# Altium PCB HT66FM5440_EVB.PcbDoc (part 1 of 3)
Units mm, origin at the board's own origin, x right, y up, seen from the top; angles counter-clockwise.
Board outline 80.01 x 50.8 mm, 2 copper layers (Top Layer, Bottom Layer); 96 components, 61 nets, 254 pads, 376 vias.
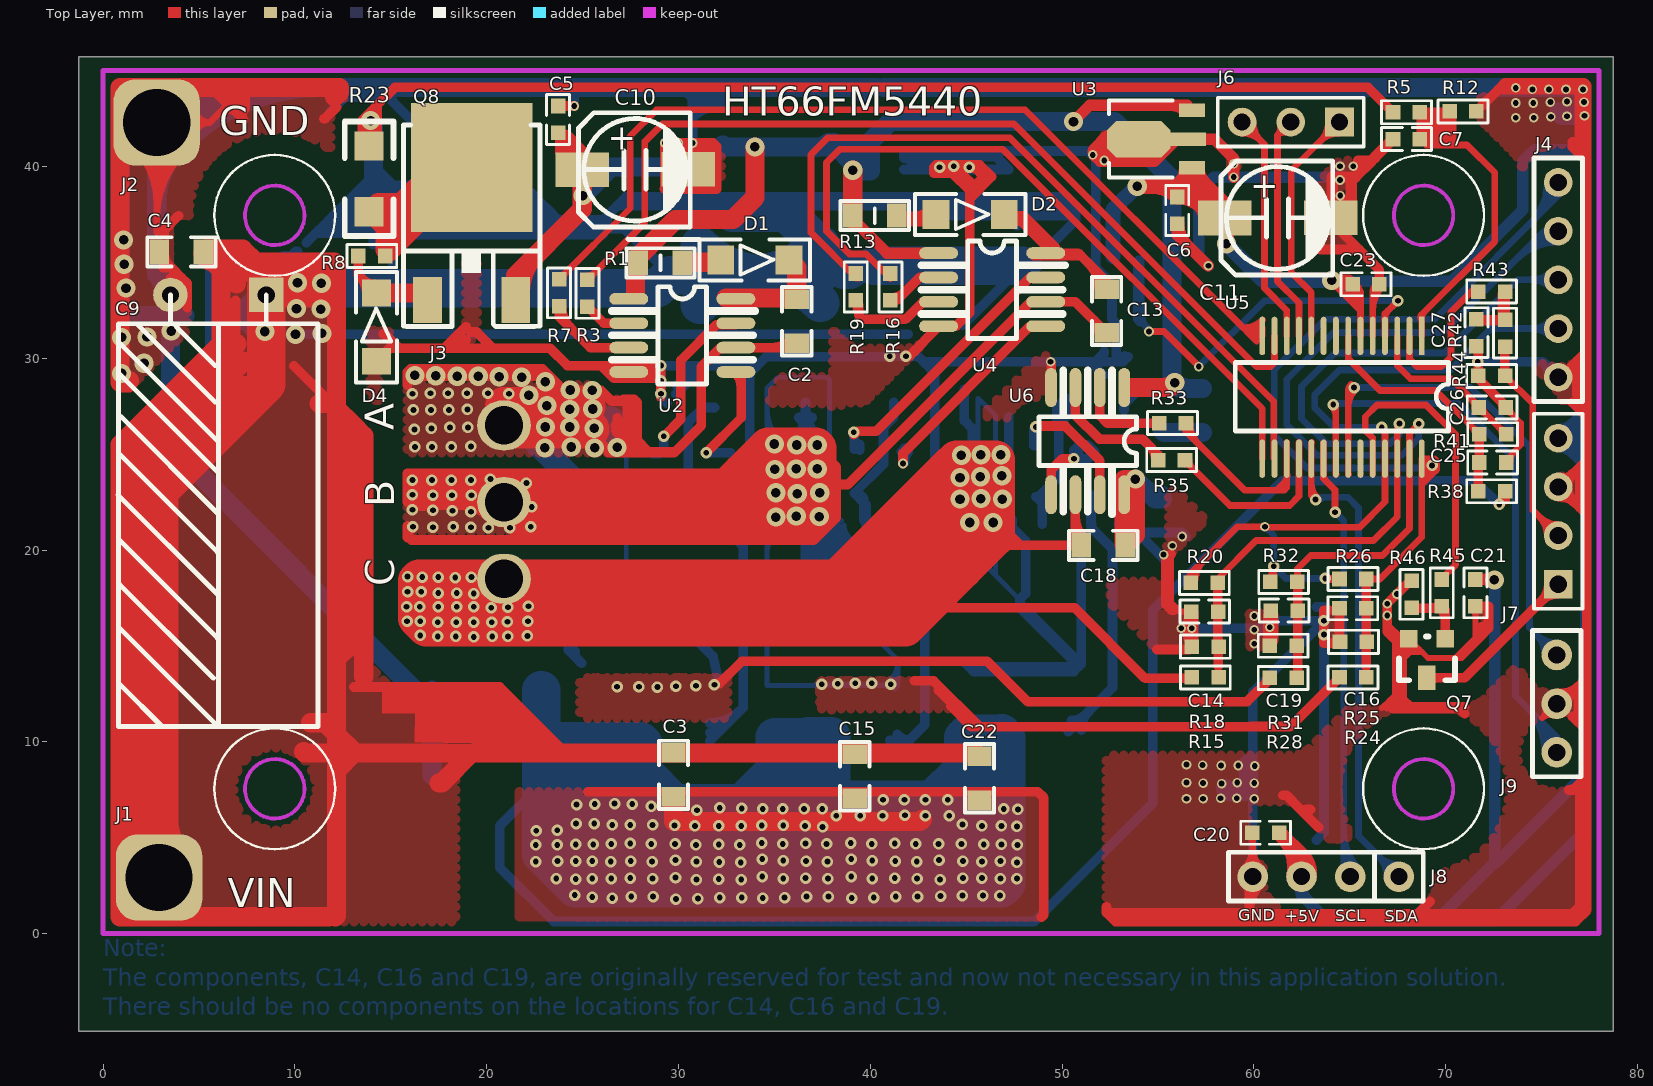
[diagram p0: Top Layer view]
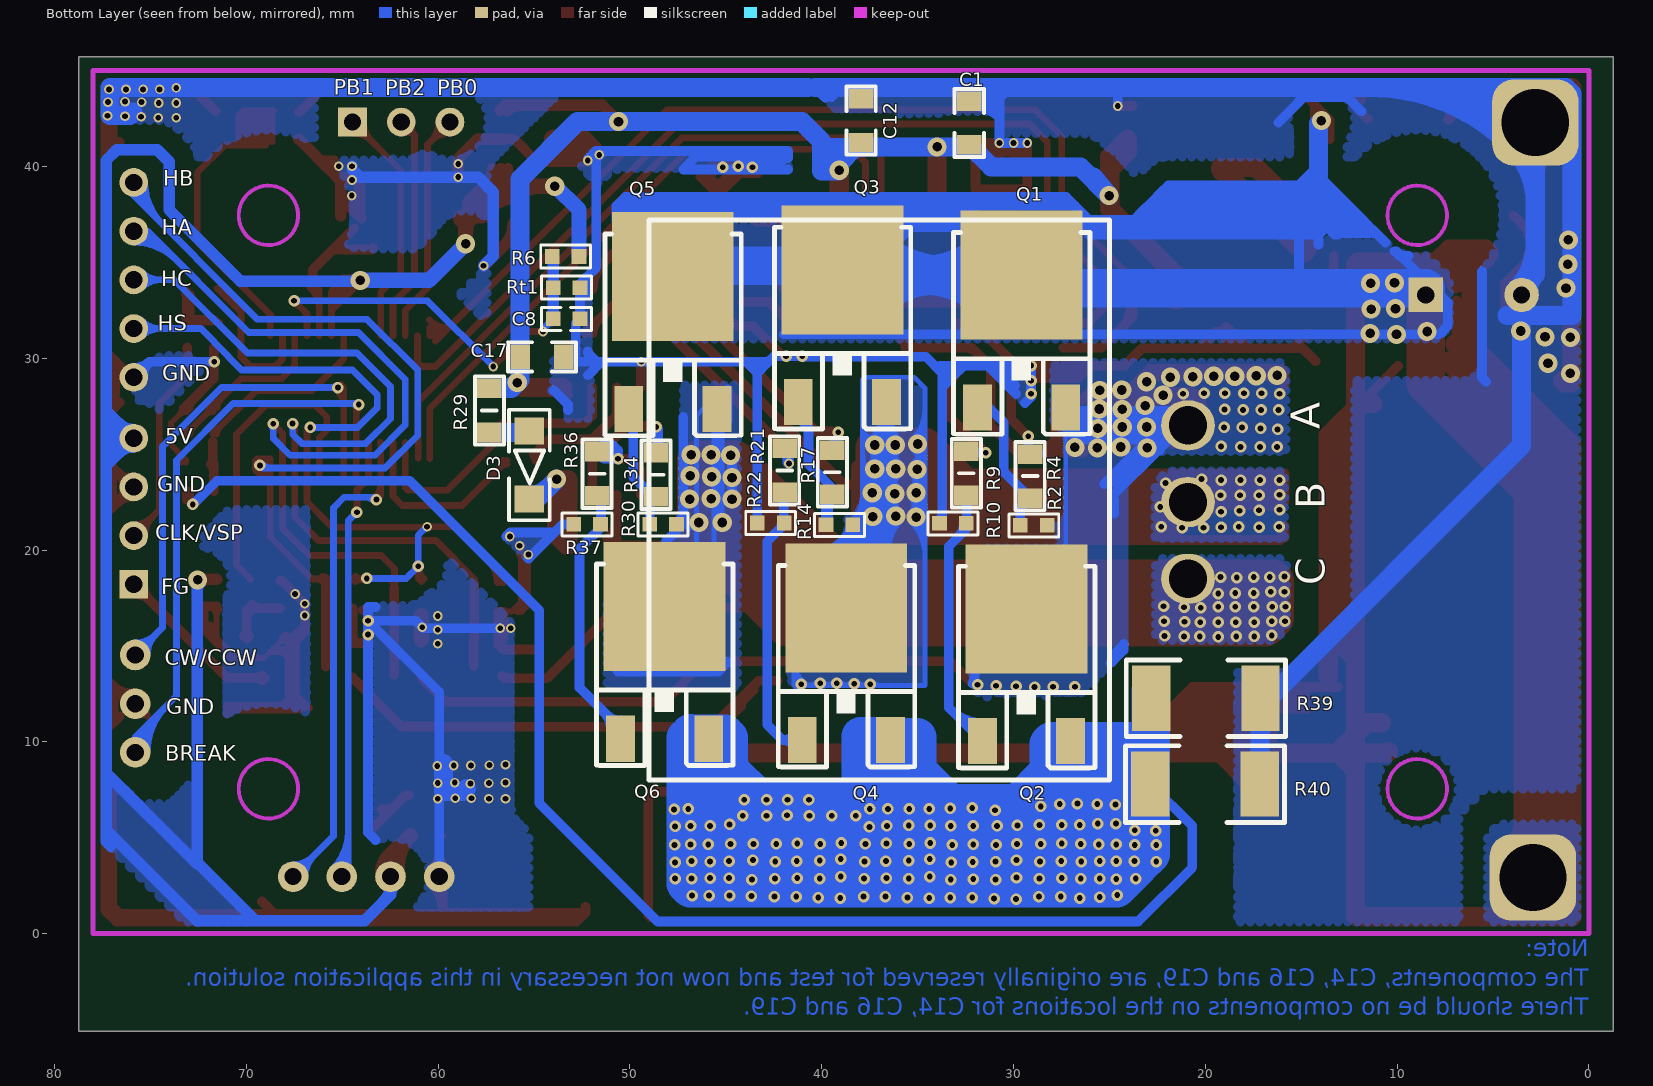
[diagram p1: Bottom Layer view, seen from below]

## Layer stack, top to bottom
Top Solder: solder mask 0.0102, Solder Resist, Dk 3.5
Top Layer: signal copper 0.0356
Dielectric1: dielectric 0.32, FR-4, Dk 4.8
Bottom Layer: signal copper 0.0356
Bottom Solder: solder mask 0.0102, Solder Resist, Dk 3.5

## Board outline
-1.27,-5.08 78.74,-5.08 78.74,45.72 -1.27,45.72

## Design rules (kind name [scope] priority, off if disabled: settings)
Clearance [All] p1: gap=0.254
ComponentClearance [All] p1: gap=0 collisioncheckmode=3 verticalgap=0 showdistances=FALSE
HoleSize [All] p1: absolutevalues=TRUE maxlimit=5 minlimit=0.025 maxpercent=80.000 minpercent=20.000
HoleToHoleClearance [All] p1: gap=0.1 allowstackedmicrovias=TRUE
MinimumSolderMaskSliver [All] p1: minsoldermaskwidth=0.1
PlaneConnect [All] p1: planeconnectstyle=Direct reliefexpansion=0.508 reliefentries=4 reliefconductorwidth=0.254 reliefairgap=0.254
PolygonConnect [All] p1: connectstyle=Direct reliefconductorwidth=0.254 reliefentries=4 polygonreliefangle="90 Angle" airgapwidth=0.254
RoutingVias [All] p1: holewidth=0.711 width=1.27 viastyle="Through Hole" minholewidth=0.3 minwidth=0.4 maxholewidth=0.711 maxwidth=1.27
SilkToSilkClearance [All] p1: silktosilkclearance=0
SilkToSolderMaskClearance SilkscreenOverComponentPads [IsPad] p1: minsilkscreentomaskgap=0 clearancetoexposedcopper=TRUE
SolderMaskExpansion [All] p1: expansion=0.102
Width [All] p1: maxlimit=3 minlimit=0.254 preferedwidth=0.254
23 further rules are at their usual default settings.

## Components (designator, comment, footprint, x,y, rotation, side; value= is the part's Value field where it differs from the comment)
C1 "0.1uF" 0805C 32.309,43.409 r270 bottom
C2 "470uF" 0805C 36.17,33.071 r270 top
C3 "0.1uF/50V" 0805C 29.743,9.423 r270 top
C4 "0.1uF" 0805C 5.22,35.547 r180 top
C5 "0.1uF" 0603C 23.724,41.758 r90 top
C6 "0.1uF" 0603C 56.007,38.405 r270 top
C7 "0.1uF" 0603C 68.656,41.427 r180 top
C8 "0.1uF" 0603C 54,32.055 r180 bottom
C9 "470uF" CD-10.5*21 8.509,33.299 r180 top
C10 "470uF" "ECAP 35V47UF" 27.737,39.827 r0 top
C11 "470uF" "ECAP 35V47UF" 61.239,37.313 r0 top
C12 "0.1uF" 0805C 37.948,43.536 r270 bottom
C13 "470uF" 0805C 52.324,33.604 r270 top
C14 "0.1uF" 0603C 56.744,16.789 r0 top
C15 "0.1uF/50V" 0805C 39.192,9.347 r270 top
C16 "0.1uF" 0603C 64.465,16.967 r0 top
C17 "0.1uF" 0805C 53.442,30.074 r0 bottom
C18 "470uF" 0805C 53.289,20.244 r180 top
C19 "0.1uF" 0603C 60.884,16.84 r0 top
C20 "0.1uF" 0603C 59.919,5.258 r0 top
C21 "0.1uF" 0603C 71.552,18.466 r270 top
C22 "0.1uF/50V" 0805C 45.695,9.246 r270 top
C23 "0.1uF" 0603C 66.548,33.858 r180 top
C25 "0.1uF" 0603C 71.755,24.562 r0 top
C26 "1uF" 0603C 71.73,27.432 r0 top
C27 "1uF" 0603C 71.603,32.029 r270 top
D1 "1N4148" 1206D 32.207,35.128 r0 top
D2 "1N4148" 1206D 43.434,37.49 r0 top
D3 "1N4148" 1206D 55.245,26.213 r270 bottom
D4 "15V" 1206D 14.249,29.845 r90 top
J1 "BAT" SIP1-big 2.921,2.921 r0 top
J2 "GND" SIP1-big 2.794,42.291 r0 top
J3 "BLDC motor(1)" SIP3-4mm 20.9,22.5 r180 top
J4 "CON5" SIP5-2.54mm 75.87,39.167 r0 top
J6 "CON3" HDR1X3 64.465,42.316 r180 top
J7 "Speed command" HDR1X4 75.87,18.212 r90 top
J8 "CON4" SIP4 67.564,2.972 r180 top
J9 "CON3" SIP3-2.54mm 75.794,9.449 r180 top
Q1 "P0706BD" TO252 31.877,27.432 r180 bottom
Q2 "P0706BD" TO252 31.623,10.033 r180 bottom
Q3 "P0706BD" TO252 41.224,27.711 r180 bottom
Q4 "P0706BD" TO252 41.021,10.084 r180 bottom
Q5 "P0706BD" TO252 50.063,27.356 r180 bottom
Q6 "P0706BD" TO252 50.495,10.16 r180 bottom
Q7 "2N3904" SOT-23 69.037,14.351 r180 top
Q8 "P0706BD" TO252 16.916,33.045 r0 top
R1 "22" 0805R 27.915,34.976 r0 top
R2 "10K" 0603R 28.245,21.285 r180 bottom
R3 "1K" 0603R 25.248,34.087 r90 top
R4 "22" 0805R 29.134,22.708 r90 bottom
R5 "91K" 0603R 68.656,42.824 r0 top
R6 "10K" 0603R 54.051,35.306 r0 bottom
R7 "1K" 0603R 23.774,34.112 r90 top
R8 "240" 0603R 13.31,35.331 r180 top
R9 "22" 0805R 32.461,25.146 r270 bottom
R10 "10K" 0603R 32.461,21.387 r180 bottom
R12 "10K" 0603R 71.603,42.875 r0 top
R13 "22" 0805R 39.091,37.44 r0 top
R14 "10K" 0603R 38.379,21.311 r180 bottom
R15 "15K 1%" 0603R 56.769,13.36 r180 top
R16 "1K" 0603R 41.046,34.417 r90 top
R17 "22" 0805R 39.446,22.911 r90 bottom
R18 "2K 1%" 0603R 56.769,14.961 r180 top
R19 "1K" 0603R 39.243,34.417 r90 top
R20 "10K 1%" 0603R 56.718,18.288 r180 top
R21 "22" 0805R 41.935,25.298 r270 bottom
R22 "10K" 0603R 41.961,21.412 r180 bottom
R23 "0" 1206 13.868,41.072 r270 top
R24 "15K 1%" 0603R 64.465,13.36 r180 top
R25 "2K 1%" 0603R 64.491,15.215 r180 top
R26 "10K 1%" 0603R 64.465,18.491 r180 top
R28 "15K 1%" 0603R 60.833,13.335 r180 top
R29 "22" 0805R 57.328,28.423 r270 bottom
R30 "10K" 0603R 47.574,21.336 r180 bottom
R31 "2K 1%" 0603R 60.833,15.011 r180 top
R32 "10K 1%" 0603R 60.858,18.339 r180 top
R33 "1K" 0603R 56.464,26.619 r0 top
R34 "22" 0805R 48.641,22.784 r90 bottom
R35 "1K" 0603R 56.413,24.689 r0 top
R36 "22" 0805R 51.714,25.121 r270 bottom
R37 "10K" 0603R 51.537,21.336 r180 bottom
R38 "1K 1%" 0603R 71.704,23.063 r180 top
R39 "0.01" 2512 17.12,12.268 r0 bottom
R40 "0.01" 2512 17.17,7.798 r0 bottom
R41 "10K" 0603R 73.152,26.035 r0 top
R42 "4.7K" 0603R 73.101,30.607 r270 top
R43 "0" 0603R 73.101,33.477 r0 top
R44 "1M" 0603R 71.704,29.083 r180 top
R45 "470" 0603R 69.799,17.069 r270 top
R46 "5.1K" 0603R 68.224,18.39 r90 top
Rt1 "68K" 0603R 52.603,33.68 r180 bottom (schematic designator RT1)
U2 "IR2101" SOP-8 27.407,33.096 r0 top
U3 "78L05" SOT-89 56.769,39.929 r90 top
U4 "IR2101" SOP-8 43.561,35.484 r0 top
U5 "HT66FM5440/28SSOP" SSOP28 68.758,31.166 r270 top
U6 "IR2101" SOP-8 53.238,28.473 r270 top

## Footprints (in the part's own frame and the unit in brackets; to place one, negate y for a bottom-side part, rotate by r counter-clockwise, add the part's x,y. Pads: shape width x height; smd on the part's side, far side on the other; paste and mask are expansions set on the pad)
0603C [mil]
  rect 30x30 smd: 1(55,0) 2(0,0)
  silkscreen extent -24,-24 79,24
0603R [mil]
  rect 30x30 smd: 1(0,0) 2(-55,0)
  silkscreen extent -79,-24 24,24
0805C [mil]
  rect 40x50 smd: 1(0,0) 2(90,0)
  silkscreen extent -25,-30 115,30
0805R [mil]
  rect 40x50 smd: 1(0,0) 2(90,0)
  silkscreen extent -25,-30 115,30
1206 [mil]
  rect 60x60 smd: 1(0,0) 2(135,0)
  silkscreen extent -50,-50 185,50
1206D [mm]
  rect 1.4x1.524 smd: 1(0,0) 2(3.553,0)
  silkscreen extent -1.1,-1.07 4.66,1.07
2512 [mm]
  rect 2x3.4 smd: 1(0,0) 2(5.7,0)
  silkscreen extent -1.3,-2 7,2
CD-10.5*21 [mm]
  rect 1.8x1.8 hole 0.9: 1(0,0)
  round 1.8 hole 0.9: 2(5,0)
  silkscreen extent -2.7,0 7.75,22.5
"ECAP 35V47UF" [mm]
  rect 2.8x1.8 smd: 1(-2.75,0) 2(2.775,0.025)
  silkscreen extent -2.95,-2.97 2.88,2.98
HDR1X3 [mm] "Connector; Header; 3 Position"
  rect 1.5x1.5 hole 0.9: 1(0,0)
  round 1.5 hole 0.9: 2(2.54,0) 3(5.08,0)
  silkscreen extent -1.27,-1.27 6.35,1.27
HDR1X4 [mm] "Connector; Header; 4 Position"
  rect 1.5x1.5 hole 0.9: 1(0,0)
  round 1.5 hole 0.9: 2(2.54,0) 3(5.08,0) 4(7.62,0)
  silkscreen extent -1.27,-1.27 8.89,1.27
SIP1-big [mm]
  rrect50% 4.5x4.5 hole 3.5: 1(0,0)
SIP3-2.54mm [mm]
  round 1.6 hole 0.9: 1(0,0) 2(0,-2.54) 3(0,-5.08)
  silkscreen extent -1.27,-6.35 1.27,1.27
SIP3-4mm [mm]
  oval 2.8x2.6 hole 2: 1(0,-4) 2(0,0) 3(0,4)
SIP4 [mm]
  round 1.6 hole 0.9: 1(0,0) 2(2.54,0) 3(5.08,0) 4(7.62,0)
  silkscreen extent -1.27,-1.27 8.89,1.27
SIP5-2.54mm [mm]
  round 1.5 hole 0.9: 1(0,0) 2(0,-2.54) 3(0,-5.08) 4(0,-7.62) 5(0,-10.16)
  silkscreen extent -1.27,-11.43 1.27,1.27
SOP-8 [mil]
  oval 80x24 smd: 1(0,0) 2(0.02,-50) 3(0,-100) 4(0,-150) 5(220,-150) 6(220,-100) 7(220,-50) 8(220,0)
  silkscreen extent -35,-175 260,25
SOT-23 [mil]
  rect 36x36 smd: 1(-37.5,-40) 2(37.5,-40)
  rect 36x50 smd: 3(0.5,40)
  silkscreen extent -58,-45 58,45
SOT-89 [mm]
  rect 0.7x1.35 smd: 1(0,0) 3(3,0)
  oct 1.9x3.3 smd: 2(1.5,2.775)
  rect 0.7x1.9 smd: 2(1.5,0.225)
  silkscreen extent -0.51,1.02 3.51,4.32
SSOP28 [mm]
  rect 2x0.3 smd: 1(0,0)
  oval 2x0.3 smd: 2(0,-0.64) 3(0,-1.28) 4(0,-1.92) 5(0,-2.56) 6(0,-3.2) 7(0,-3.84) 8(0,-4.48) 9(0,-5.12) 10(0,-5.76) 11(0,-6.4) 12(0,-7.04) 13(0,-7.68) 14(0,-8.32) 15(6.4,-8.32) 16(6.4,-7.68) 17(6.4,-7.04) 18(6.4,-6.4) 19(6.4,-5.76) 20(6.4,-5.12) 21(6.4,-4.48) 22(6.4,-3.84) 23(6.4,-3.2) 24(6.4,-2.56) 25(6.4,-1.92) 26(6.4,-1.28) 27(6.4,-0.64) 28(6.4,0)
  silkscreen extent 1.4,-9.73 4.95,1.4
TO252 [mm]
  rect 1.5x2.4 smd: 1(0,0) 3(4.6,0)
  rect 6.35x6.73 smd: 2(2.3,6.9)
  silkscreen extent -1.24,-1.4 5.87,9.12

## Part data
C1 C3 C4 C5 C6 C7 C8 C12 C14 C15 C16 C17 C19 C20 C21 C22 C23 C25 C26 C27: library part Cap(1), "Capacitor"
C2 C9 C10 C11 C13 C18: library part Cap(2), "Capacitor"
D1 D2 D3: library part Diode(1), "Diode"
D4: library part Zener(1), "Zener Diode"
J1 J2: library part CON1, "CON1"
J3: library part "BLDC motor(1)_1"
J7: library part CON4
Q1 Q2 Q3 Q4 Q5 Q6 Q8: library part NMOS(4), "N-Channel Power MOSFET"
Q7: library part NPN(2), "NPN Bipolar Transistor"
R1 R2 R3 R4 R5 R6 R7 R8 R9 R10 R12 R13 R14 R15 R16 R17 R18 R19 R20 R21 R22 R23 R24 R25 R26 R28 R29 R30 R31 R32 R33 R34 R35 R36 R37 R38 R39 R40 R41 R42 R43 R44 R45 R46: library part Resistor(1)_1, "Resisitor"
Rt1: library part Sensor(1)
U2 U4 U6: library part IR2101/SOP-8
U3: library part 78L05_1

## Via types
v1: diameter 0.6, hole 0.3, Top Layer to Bottom Layer, 247 vias
v2: diameter 1, hole 0.5, Top Layer to Bottom Layer, 69 vias
v3: diameter 0.5, hole 0.3, Top Layer to Bottom Layer, 60 vias

## Nets (pads, with @x,y where several pads share a name; then routed paths per layer and width w, separated by ;. In a path a pad name is that pad's centre, name@x,y a point inside that pad or via, vN(x,y) a via of type N, cw(c..) or ccw(c..) an arc to the next point about the centre after c; other vN are vias at no path point)
5V: C6.2 C11.1 C20.1 C21.2 C23.1 J7.4 J8.3 R6.2 U3.1 U5.6 | length 187.3
  Top Layer w0.35: J8.3@62.103,3.353 J8.3@62.484,2.972 ; v2@64.11,33.934 64.186,33.858 65.164,32.88 ; 64.668,33.858 65.164,33.363 ; C23.1@65.151,33.858 C23.1@65.164,33.846 ; C23.1@65.25,33.962 cw(c64.566,33.245) 65.558,33.245 ; C23.1@65.357,33.858 ccw(c65.854,33.858) C23.1@65.503,33.507 ; U5.6@65.558,31.166 65.558,32.486 ; 65.164,32.88 65.164,33.363 ; 65.164,32.88 65.354,32.69 ; 65.164,33.363 C23.1@65.164,33.846 ; C23.1@65.164,33.846 C23.1@65.354,33.655 ; 65.354,32.69 C23.1@65.354,33.655 ; 65.354,32.69 65.558,32.486 ; C23.1@65.354,33.655 65.558,33.451 65.558,32.486
  Top Layer w0.5: C6.2@56.007,38.274 cw(c56.007,36.547) C11.1@57.228,37.768 ; 56.043,39.203 ccw(c55.318,39.929) U3.1@56.344,39.929 ; U3.1@56.694,39.929 ccw(c57.617,39.929) 56.964,39.276 ; C11.1@57.096,37.9 cw(c56.509,37.313) C11.1@57.339,37.313 ; 57.119,38.745 cw(c58.018,39.264) U3.1@57.175,39.87 ; U3.1@57.191,39.903 ccw(c58.352,39.592) 57.311,38.991 ; C11.1@57.346,37.405 ccw(c54.748,37.78) U3.1@56.604,39.637 ; C11.1@57.369,37.505 ccw(c55.06,38.22) U3.1@56.769,39.929 ; C11.1@57.415,37.616 ccw(c56.821,37.93) 57.296,38.405 ; 57.495,39.203 cw(c58.22,39.929) 57.194,39.929 ccw(c59.324,39.929) 57.818,38.423 ; C11.1@57.906,37.957 cw(c57.703,39.517) 56.591,38.405 ; C11.1@58.413,36.62 C11.1@58.413,37.287 ; C11.1@58.489,37.313 58.489,38.208 58.337,38.361 ; U3.1@56.477,39.637 56.007,39.167 C6.2@56.007,38.405 56.591,38.405 ; U3.1@56.477,39.637 U3.1@56.769,39.929 ; U3.1@56.477,39.637 U3.1@56.604,39.637 ; 56.591,38.405 57.296,38.405 ; 56.591,38.405 57.709,37.287 C11.1@58.337,37.287 ; U3.1@56.604,39.637 C11.1@58.337,37.904 ; U3.1@56.769,39.929 58.337,38.361 ; 57.296,38.405 C11.1@58.337,37.363 ; C11.1@58.337,37.287 C11.1@58.337,37.363 ; C11.1@58.337,37.287 C11.1@58.413,37.287 ; C11.1@58.337,37.363 C11.1@58.337,37.904 ; C11.1@58.337,37.363 C11.1@58.413,37.287 ; C11.1@58.337,37.904 58.413,37.827 C11.1@58.413,37.287 ; C11.1@58.337,37.904 58.337,38.361
  Top Layer w0.6: v2(64.059,34.061) 64.948,34.061 C23.1@65.151,33.858 64.668,33.858 v2@64.186,33.858 ; C21.2@71.552,18.466 72.517,18.466 v2(72.542,18.44) ; 71.998,18.466 cw(c71.998,17.896) v2@72.401,18.299
  Top Layer w0.8: v2(53.924,38.964) 55.448,38.964 ; 54.704,38.964 cw(c54.704,37.102) C6.2@56.02,38.418 ; 55.804,38.964 55.448,38.964 ; C6.2@56.007,38.405 55.448,38.964 ; C11.1@58.413,37.287 58.572,37.128 v2(58.572,35.966) ; J8.3@62.091,3.047 ccw(c59.82,3.483) 61.455,5.118 62.484,4.089 J8.3@62.484,2.972 ; J8.3@62.201,3.255 ccw(c61.518,3.937) 62.484,3.937 ccw(c63.45,3.937) J8.3@62.767,3.255 ; 62.522,4.051 cw(c61.611,3.139) J8.3@62.877,2.896 ; 55.448,38.964 cw(c55.448,38.385) 56.026,38.405 ccw(c55.448,38.385) 55.448,38.964
  Top Layer w1: C11.1@58.413,37.287 C11.1@58.725,37.287
  Bottom Layer w0.508: 77.089,4.521 77.365,4.797 77.365,5.74
  Bottom Layer w0.6: J8.3@62.205,2.557 cw(c61.851,2.032) 62.484,2.032 ; J8.3@62.384,2.978 ccw(c64.143,2.865) 62.897,1.619 ; J8.3@62.484,2.972 62.484,2.032 ; J8.3@62.763,2.557 ccw(c63.117,2.032) 62.484,2.032 ; v2(64.059,34.061) 64.11,34.011 70.307,34.011 74.028,37.732 74.028,40.246 74.651,40.869 76.759,40.869 77.319,40.308 77.319,27.281 ; v2@64.2,34.203 ccw(c64.664,34.667) 64.664,34.011 ; v2@72.401,18.299 cw(c71.998,17.896) 72.568,17.896 ; 72.568,3.632 77.174,8.238 ; v2@72.568,18.44 72.568,3.708 69.54,0.681 ; J7.4@75.87,25.382 cw(c75.87,24.295) 76.638,25.064 cw(c77.406,25.832) J7.4@76.32,25.832 ; J7.4@75.87,26.282 ccw(c75.87,27.368) 76.638,26.6 ccw(c77.406,25.832) J7.4@76.32,25.832 ; J7.4@75.957,25.39 cw(c76.13,24.518) 76.759,25.147 ; J7.4@76.014,26.258 ccw(c76.325,27.18) 77.013,26.492 ; J7.4@76.241,26.086 ccw(c77.013,26.615) 77.013,25.679 ; 76.493,25.413 cw(c76.912,25.832) J7.4@76.32,25.832 ; 77.294,24.613 76.759,25.147 ; 62.484,2.032 63.835,0.681 69.54,0.681 ; 69.54,0.681 72.588,0.681 77.319,5.412 77.319,24.383 ; J7.4@75.87,25.832 77.319,27.281 ; J7.4@75.87,25.832 J7.4@76.074,25.832 ; J7.4@75.87,25.832 77.319,24.383 ; J7.4@76.074,25.832 J7.4@76.352,25.832 ; J7.4@76.074,25.832 J7.4@76.352,25.554 ; J7.4@76.352,25.554 J7.4@76.352,25.832 ; J7.4@76.352,25.554 76.759,25.147 ; J7.4@76.352,25.832 77.013,26.492 ; J7.4@76.352,25.832 76.505,25.679 77.013,25.679 ; 76.759,25.147 77.013,25.4 77.013,25.679 ; 77.013,25.679 77.013,26.492 ; 77.319,24.383 77.319,27.281
  Bottom Layer w0.8: R6.2@52.654,35.306 52.654,37.744 v2@53.899,38.989 ; v2(58.572,35.966) 60.477,34.061 v2(64.059,34.061)
+15V: C1.2 C5.2 C10.1 C12.2 C17.2 Q8.3 R1.1 R13.1 R29.1 U2.1 U3.3 U4.1 U6.1 | length 100.1
  Top Layer w0.5: U6.1@53.213,28.067 U6.1@53.227,28.067
  Top Layer w0.6: R13.1@39.091,37.262 40.869,35.484 U4.1@43.561,35.484 U4.1@44.145,35.484 ; v2(50.597,42.342) 51.435,43.18 56.518,43.18 U3.3@56.769,42.929 ; 55.717,43.18 cw(c55.717,42.202) U3.3@56.409,42.893
  Top Layer w1: Q8.3@21.516,33.045 21.516,34.318 24.987,37.788 C10.1@24.987,39.827 ; Q8.3@21.766,33.495 cw(c24.356,33.495) 22.525,35.326 ; U2.1@27.762,33.35 27.762,35.154 29.845,37.236 32.842,37.236 33.985,38.379 v2(33.985,41.021) ; R13.1@39.091,37.262 R13.1@39.091,37.44 v2(39.091,39.802) ; U6.1@53.492,28.473 55.626,28.473 v2(55.88,28.727) cw(c55.267,29.341) 55.267,28.473 ; 24.054,41.3 24.054,41.427 24.987,40.494 C10.1@24.987,40.367 ; 24.054,41.3 24.054,40.76 C10.1@24.987,39.827 ; 24.054,41.3 C10.1@24.987,40.367 ; C10.1@24.987,39.827 C10.1@24.987,40.367
  Bottom Layer w1: 25.832,39.446 v2(25.019,38.481) 26.518,39.98 31.166,39.98 C1.2@32.309,41.123 32.414,41.018 34.571,41.018 ; v2(33.985,41.021) 34.571,41.018 ; 37.193,41.002 ccw(c37.198,41.88) C12.2@37.815,41.255 ; C12.2@38.08,41.255 ccw(c38.707,41.882) 38.707,40.996 ; 39.751,40.996 C12.2@38.252,40.996 ; 39.929,40.513 40.005,40.437 ; 56.616,28.423 cw(c56.616,29.463) v2(55.88,28.727) ; R29.1@57.328,28.423 56.185,28.423 v2(55.88,28.727) ; 34.571,41.018 35.509,41.012 37.946,40.997 C12.2@38.252,40.996 ; C12.2@38.252,40.996 39.091,40.157 v2(39.091,39.802) 39.116,39.776 40.005,39.776 40.005,40.437 ; 40.005,40.437 40.005,41.3 41.046,42.342 v2(50.597,42.342) 52.73,42.342 55.728,39.345 C17.2@55.728,30.074 55.728,28.88 v2(55.88,28.727)
BAT: C3.1 C4.1 C9.1 C15.1 C22.1 J1.1 Q1.2 Q3.2 Q5.2 R5.2 R23.1 | length 616.8
  Top Layer w0.5: v2@11.328,33.655 11.938,33.655 ; R23.1@13.506,41.434 13.513,41.44 v2@13.513,42.393 ; R23.1@13.868,41.072 R23.1@14.23,41.434 ; v2@13.868,42.012 v2@13.868,42.393 ; R23.1@13.945,41.199 v2(13.945,42.393) v2@13.868,42.393 ; R5.2@67.259,42.824 65.964,44.12 15.215,44.12 14.287,43.193 ; v2@13.513,42.393 13.513,42.418 v2@13.868,42.774 ; v2@13.513,42.393 v2@13.868,42.393 ; v2@13.868,42.393 v2@13.868,42.774 ; v2@13.868,42.774 14.173,43.078 ; 14.173,43.078 14.173,41.491 R23.1@14.23,41.434 ; 14.173,43.078 14.287,43.193 ; R23.1@14.23,41.434 14.287,41.491 14.287,43.193
  Top Layer w0.508: 6.909,31.039 6.909,33.017 ; 9.957,29.591 11.913,27.635 12.161,27.387 ; 11.709,35.025 12.065,34.67 12.065,33.553 ; 13.081,12.852 20.676,12.852 21.234,12.294 ; R23.1@13.868,41.072 v2@13.868,42.012 ; 20.777,11.557 20.828,11.506 21.615,11.506 ; 22.301,10.693 22.479,10.516 22.987,10.516 23.368,10.135 23.292,10.058 22.25,10.058 22.25,11.278 ; 24.105,9.423 22.25,11.278 ; 21.234,12.294 21.234,11.887 21.615,11.506 ; 21.234,12.294 21.819,11.709 ; 21.615,11.506 21.819,11.709 ; 21.819,11.709 22.25,11.278
  Top Layer w1: J1.1@2.037,3.805 1.575,4.267 1.575,21.869 ; C4.1@5.225,35.426 ccw(c6.193,36.393) 6.193,35.025 ; C4.1@5.227,35.423 ccw(c5.818,35.663) 5.818,35.025 ; 6.96,33.884 5.818,35.025 ; 7.31,29.845 7.31,29.789 1.829,24.308 ; 7.493,28.575 7.391,28.575 2.794,23.978 2.159,23.978 ; C9.1@8.509,33.655 7.139,35.025 ; v2@10.236,33.655 8.866,35.025 ; 10.447,9.482 10.506,9.423 12.161,9.423 ; 10.82,10.998 11.557,10.998 12.161,10.394 ; 11.252,27.635 11.913,27.635 ; 11.76,0.881 0.881,0.881 0.881,25.494 6.147,30.759 ; 12.116,0.881 12.161,0.926 12.161,8.484 ; 13.589,13.411 13.589,25.959 13.005,26.543 ; 17.526,7.849 17.653,7.849 19.228,9.423 ; C22.1@45.695,9.246 45.517,9.423 C3.1@29.743,9.423 24.105,9.423 19.228,9.423 ; 1.575,21.869 2.159,22.454 2.159,23.978 ; 1.575,21.869 1.575,24.054 ; 1.575,24.054 1.575,24.562 ; 1.575,24.054 1.829,24.308 ; 1.575,24.562 1.829,24.308 ; 1.575,24.562 1.575,25.349 6.985,30.759 6.147,30.759 ; 1.829,24.308 2.159,23.978 ; 5.818,35.025 7.139,35.025 ; 6.147,30.759 6.147,34.62 C4.1@5.22,35.547 5.359,35.687 7.284,35.687 7.946,35.025 ; 7.139,35.025 7.946,35.025 ; 7.946,35.025 8.866,35.025 ; 8.866,35.025 11.709,35.025 12.055,35.025 12.161,34.919 12.161,27.387 ; 12.161,8.484 13.101,9.423 ; 12.161,8.484 12.161,9.423 ; 12.161,9.423 12.161,10.394 ; 12.161,9.423 13.101,9.423 ; 12.161,10.394 13.132,9.423 ; 12.161,10.394 12.161,14.3 ; 12.161,14.3 13.005,15.144 13.005,26.543 ; 12.161,14.3 12.161,27.387 ; 12.161,27.387 13.005,26.543 ; 13.101,9.423 13.132,9.423 ; 13.132,9.423 19.228,9.423
  Top Layer w2: J1.1@2.921,2.921 2.921,23.073 8.509,28.661 C9.1@8.509,33.299 8.509,33.655 10.236,33.655 v2@11.328,33.655 ; 2.921,5.939 ccw(c5.939,5.939) J1.1@3.805,3.805
  Bottom Layer w0.5: C9.1@8.509,33.655 C9.1@8.509,34.041 ; 10.141,35.568 10.036,35.568 9.809,35.341 C9.1@8.509,34.041 ; 13.564,36.754 13.767,36.754 14.097,36.754 14.63,36.754 15.113,36.754 ; 15.113,33.68 15.113,36.373 15.113,36.449 15.113,36.754 ; 26.797,37.948 26.289,37.44 26.06,37.211 25.603,36.754 ; Q1.2@29.577,34.332 27.155,36.754 25.603,36.754 ; 41.981,31.242 v2(10.033,31.242) 7.798,31.242 7.366,31.674 7.366,32.898 C9.1@8.509,34.041 ; Q5.2@44.826,31.725 47.916,34.815 Q5.2@48.458,35.357 ; 15.113,36.754 24.181,36.754 25.603,36.754
  Bottom Layer w0.508: 9.408,35.341 9.809,35.341 9.919,35.341 ; 10.606,36.028 11.154,36.576 ; 13.081,36.449 13.259,36.449 13.335,36.525 ; 13.767,36.754 14.072,36.449 14.097,36.449 ; v2@13.771,42.219 cw(c12.983,41.431) 14.097,41.431 ; 14.097,35.916 14.097,36.449 ; 14.097,40.056 15.138,39.014 ; 15.113,36.373 15.011,36.373 14.935,36.449 ; 24.257,36.678 24.181,36.754 23.724,37.211 ; 26.06,36.449 15.113,36.449 14.935,36.449 ; 26.289,36.957 26.289,37.186 ; 26.289,37.44 26.289,37.186 ; Q5.2@47.658,36.919 47.658,37.763 47.473,37.948 ; Q5.2@47.763,34.256 50.698,37.191 50.698,37.948 50.241,38.405 47.015,38.405 ; 11.154,36.576 11.533,36.955 ; 11.154,36.576 11.205,36.525 13.335,36.525 ; 11.533,36.955 11.789,37.211 ; 11.533,36.955 13.362,36.955 13.564,36.754 ; 11.789,37.211 12.14,37.562 12.14,37.568 ; 11.789,37.211 14.021,37.211 ; 11.789,37.211 11.784,37.211 12.14,37.568 ; 12.14,37.568 12.241,37.668 ; 12.241,37.668 12.723,38.151 ; 12.241,37.668 14.097,37.668 ; 12.723,38.151 13.206,38.633 ; 12.723,38.151 14.097,38.151 ; 13.206,38.633 13.741,38.633 14.097,38.633 ; 13.206,38.633 14.097,39.524 14.097,39.37 ; 13.335,36.525 13.564,36.754 ; 13.564,36.754 14.021,37.211 ; 14.021,37.211 14.097,37.287 ; 14.021,37.211 14.097,37.211 ; 14.097,36.449 14.097,36.754 14.097,37.211 ; 14.097,36.449 14.935,36.449 ; 14.097,37.211 14.097,37.287 ; 14.097,37.211 14.173,37.211 ; 14.097,37.287 14.097,37.668 ; 14.097,37.287 14.173,37.211 ; 14.097,37.668 14.097,38.151 ; 14.097,37.668 23.266,37.668 ; 14.097,38.151 15.316,38.151 ; 14.097,38.151 14.097,38.633 ; 14.097,38.633 14.097,38.989 14.097,39.37 ; 14.097,38.633 14.834,38.633 ; 14.097,39.37 14.453,39.014 ; 14.173,37.211 14.63,36.754 14.935,36.449 ; 14.173,37.211 23.724,37.211 ; 14.453,39.014 15.138,39.014 ; 14.453,39.014 14.834,38.633 ; 14.834,38.633 15.265,38.633 ; 14.834,38.633 15.316,38.151 ; 15.138,39.014 21.92,39.014 22.301,38.633 ; 15.138,39.014 15.265,38.887 15.265,38.633 ; 15.265,38.633 22.301,38.633 ; 15.316,38.151 22.784,38.151 ; 22.301,38.633 22.784,38.151 ; 22.784,38.151 23.266,37.668 ; 23.266,37.668 23.724,37.211 ; 23.724,37.211 26.06,37.211 26.264,37.211 26.289,37.186 ; 47.015,38.405 27.254,38.405 26.797,37.948 47.473,37.948 ; 47.015,38.405 47.473,37.948
  Bottom Layer w1: 13.741,38.633 14.097,38.989 ; 14.097,39.524 14.097,40.056 v2@14.097,42.24
  Bottom Layer w2: C9.1@8.509,33.655 28.9,33.655 Q1.2@29.577,34.332 Q3.2@37.324,34.332 ; Q1.2@31.115,32.794 cw(c34.828,29.081) 34.828,34.332 cw(c34.828,39.583) Q1.2@31.115,35.87 ; 32.817,37.592 35.636,37.592 38.617,34.611 Q3.2@38.924,34.611 ; 33.457,34.332 ccw(c33.457,39.888) Q3.2@37.386,35.959 ; 33.889,34.332 cw(c33.889,29.386) Q3.2@37.386,32.883 ; Q3.2@40.169,34.815 Q5.2@47.916,34.815
  other v2: 11.405,31.293 8.433,31.394 11.354,32.563 10.084,32.588 11.379,33.909 10.135,33.934
BREAK: J9.1 U5.21 | length 38.1
  Top Layer w0.35: v1@64.047,27.496 cw(c63.488,26.938) 64.278,26.938 ; v1@64.278,27.584 U5.21@64.278,24.766 64.278,23.962 U5.21@64.287,23.952
  Bottom Layer w0.35: v1@64.135,27.635 70.688,27.635 73.64,24.683 73.64,12.404 75.794,10.251 ; v1@64.223,27.496 cw(c64.559,27.16) 64.559,27.635 ; 74.16,11.885 cw(c71.724,9.449) J9.1@75.169,9.449 ; 74.757,11.287 cw(c72.919,9.449) J9.1@75.519,9.449 ; 75.355,10.69 cw(c74.114,9.449) J9.1@75.869,9.449 ; J9.1@75.641,10.055 ccw(c75.592,10.251) 75.794,10.251 ; J9.1@75.794,9.449 75.794,10.251 ; J9.1@75.946,10.055 cw(c75.996,10.251) 75.794,10.251
  other v1: 64.135,27.584
CW/CCW: J9.3 U5.22 | length 31.8
  Top Layer w0.35: 64.918,27.425 cw(c66.276,27.425) v1@65.316,28.385 ; 64.918,28.036 cw(c65.23,28.036) v1@65.228,28.348 ; 64.918,28.27 cw(c65.431,28.27) v1@65.068,28.632 ; U5.22@64.948,23.952 64.918,23.982 U5.22@64.918,24.766 64.918,28.164 v1(65.227,28.473) ; v1@65.102,28.473 cw(c64.8,28.473) 65.014,28.26 cw(c65.227,28.047) v1@65.227,28.348
  Bottom Layer w0.35: v1(65.227,28.473) 71.298,28.473 74.371,25.4 74.371,15.951 J9.3@75.794,14.529 ; v1@65.316,28.385 cw(c65.529,28.172) 65.529,28.473 cw(c65.529,28.775) v1@65.316,28.562 ; J9.3@75.169,14.529 ccw(c73.66,14.529) 74.727,15.596 ccw(c75.794,16.663) J9.3@75.794,15.154
FG: J7.1 Q7.3 | length 11.5
  Top Layer w0.5: Q7.3@69.025,13.335 70.993,13.335 J7.1@75.87,18.212 ; Q7.3@69.171,13.188 cw(c69.525,12.835) 69.525,13.335 cw(c69.525,13.835) Q7.3@69.171,13.482 ; J7.1@75.37,18.212 cw(c74.163,18.212) 75.016,17.358 cw(c75.87,16.505) J7.1@75.87,17.712